# Altium PCB MachineLearning-MM-Carrier.PcbDoc
Units mil, origin at the board's own origin, x right, y up, seen from the top; angles counter-clockwise.
Board outline 2300 x 2050 mil, 2 copper layers (Top, Bottom); 138 components, 57 nets, 309 pads, 134 vias.
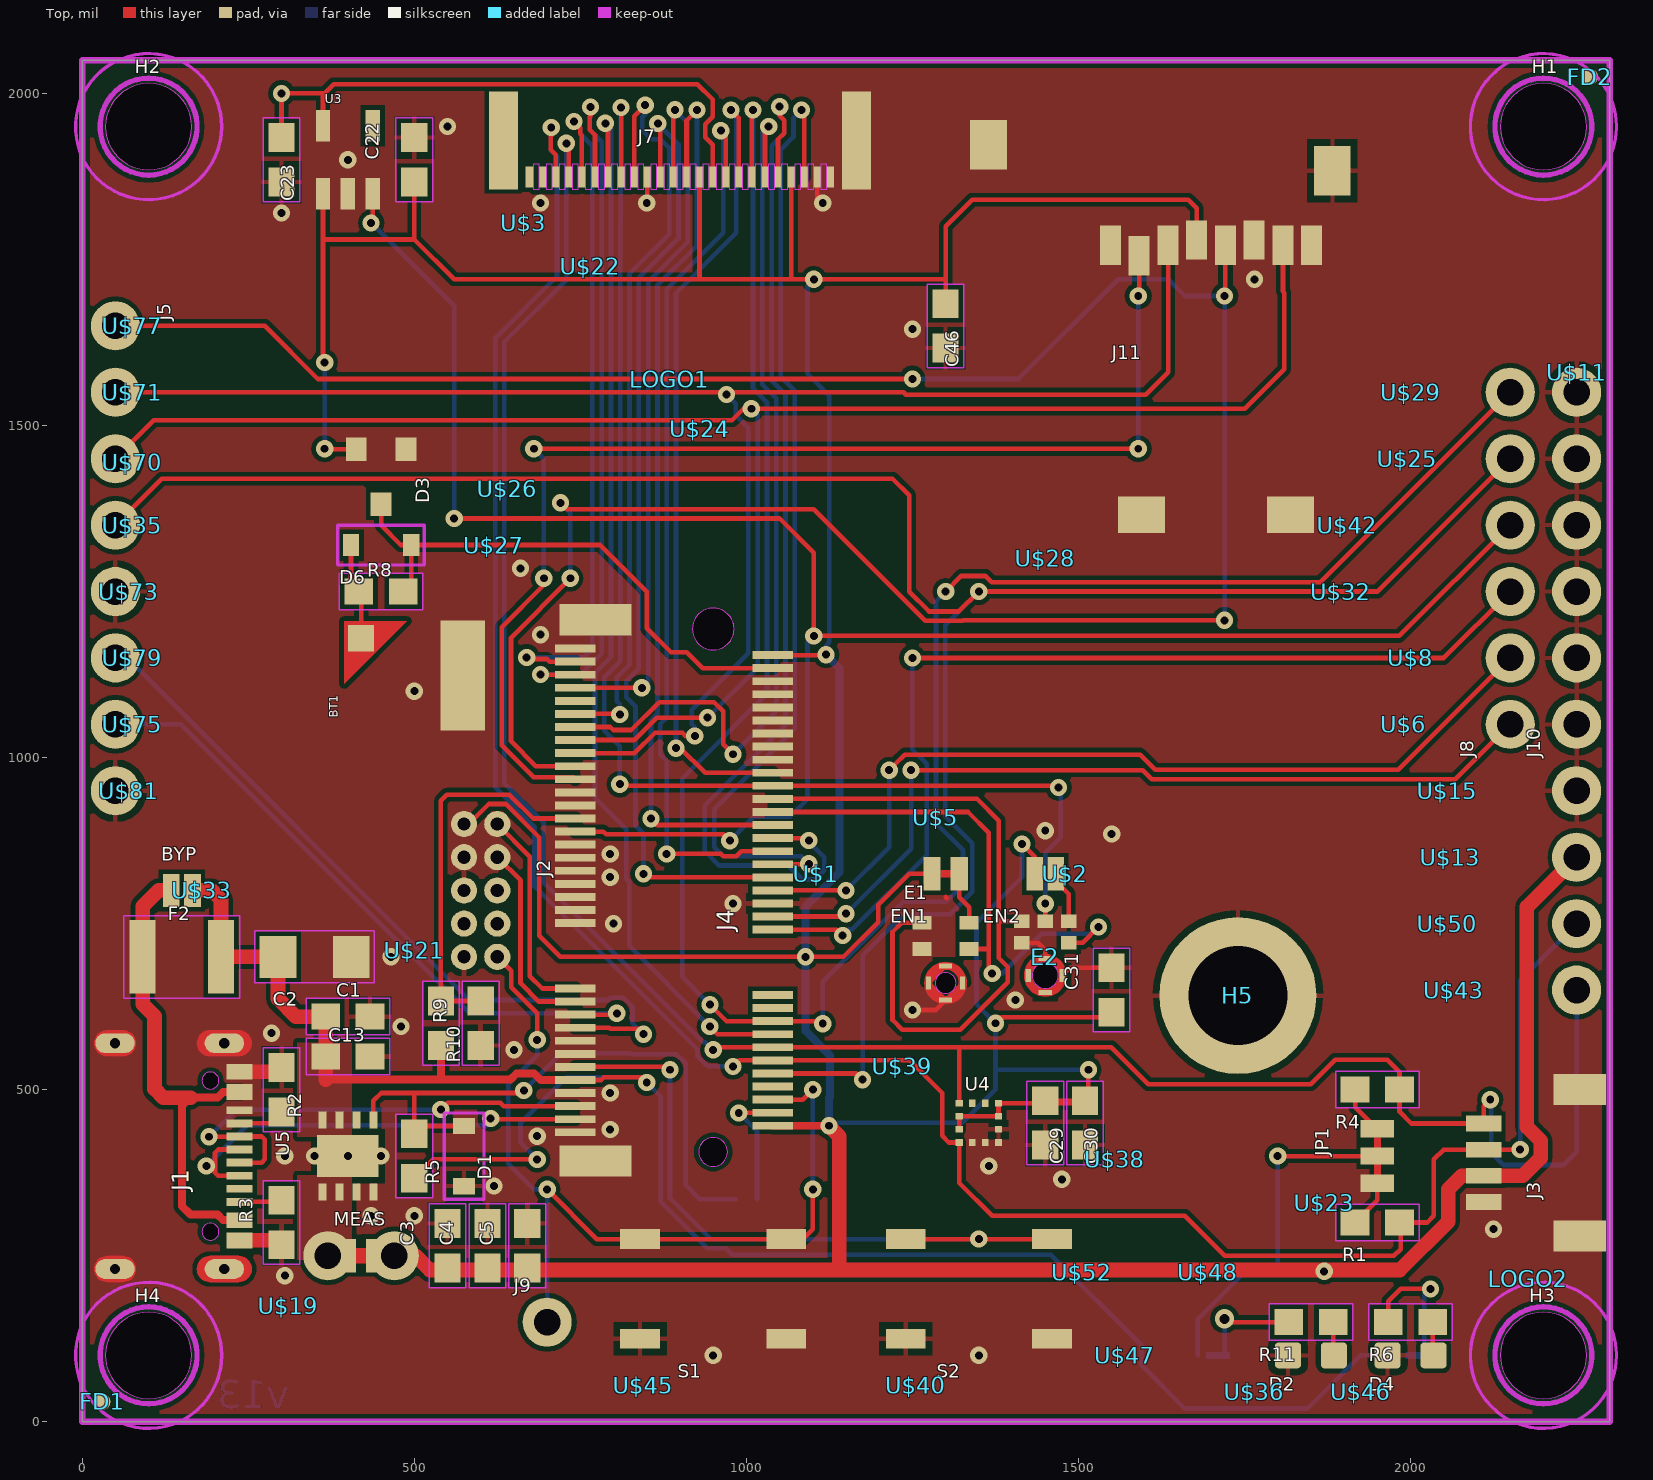
[diagram p0: Top view]
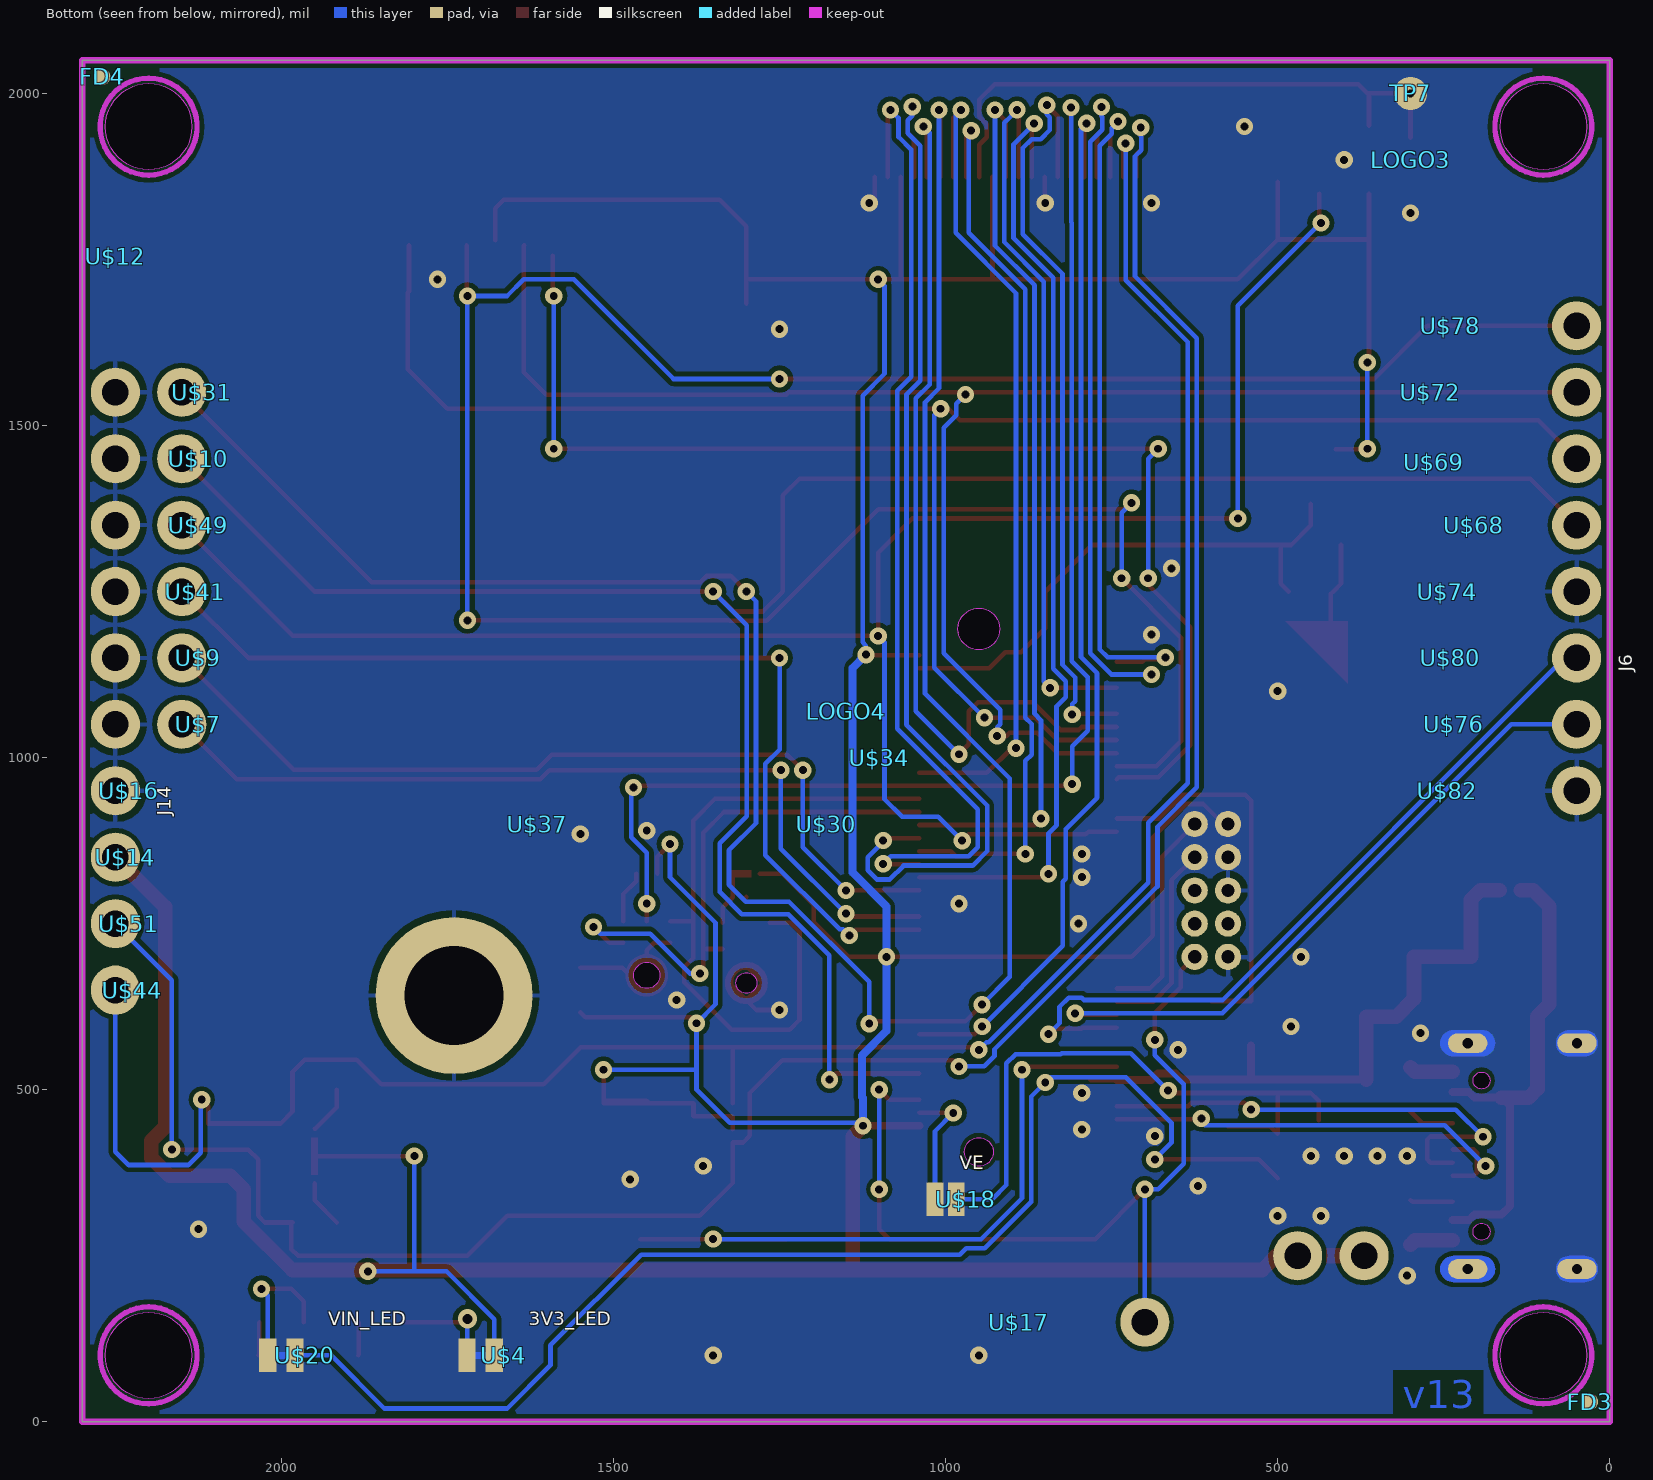
[diagram p1: Bottom view, seen from below]

## Layer stack, top to bottom
Top Solder: solder mask 0.4, Solder Resist, Dk 3.5
Top: signal copper 1.378
Dielectric 1: dielectric 12.6, FR-4, Dk 4.8
Bottom: signal copper 1.378
Bottom Solder: solder mask 0.4, Solder Resist, Dk 3.5

## Board outline
2300,0 0,0 0,2050 2300,2050
cut-out: 100,1885 ccw(c100,1950) 165,1950 ccw(c100,1950) 100,2015 ccw(c100,1950) 35,1950 ccw(c100,1950)
cut-out: 2200,35 ccw(c2200,100) 2265,100 ccw(c2200,100) 2200,165 ccw(c2200,100) 2135,100 ccw(c2200,100)
cut-out: 100,35 ccw(c100,100) 165,100 ccw(c100,100) 100,165 ccw(c100,100) 35,100 ccw(c100,100)
cut-out: 2200,1885 ccw(c2200,1950) 2265,1950 ccw(c2200,1950) 2200,2015 ccw(c2200,1950) 2135,1950 ccw(c2200,1950)
cut-out: 950,1162.2 ccw(c950,1193.7) 981.5,1193.7 ccw(c950,1193.7) 950,1225.19 ccw(c950,1193.7) 918.5,1193.7 ccw(c950,1193.7)
cut-out: 950,384.64 ccw(c950,406.3) 971.65,406.3 ccw(c950,406.3) 950,427.95 ccw(c950,406.3) 928.35,406.3 ccw(c950,406.3)
cut-out: 1450,652.37 ccw(c1450,672.05) 1469.68,672.05 ccw(c1450,672.05) 1450,691.74 ccw(c1450,672.05) 1430.32,672.05 ccw(c1450,672.05)
cut-out: 1300,644.88 ccw(c1300,660.63) 1315.75,660.63 ccw(c1300,660.63) 1300,676.38 ccw(c1300,660.63) 1284.25,660.63 ccw(c1300,660.63)
cut-out: 193.11,273.43 ccw(c193.11,286.22) 205.91,286.22 ccw(c193.11,286.22) 193.11,299.01 ccw(c193.11,286.22) 180.31,286.22 ccw(c193.11,286.22)
cut-out: 193.11,500.99 ccw(c193.11,513.78) 205.91,513.78 ccw(c193.11,513.78) 193.11,526.58 ccw(c193.11,513.78) 180.31,513.78 ccw(c193.11,513.78)

## Design rules (kind name [scope] priority, off if disabled: settings)
BoardOutlineClearance mdCopperDimension [All] p1: gap=10 ignorepadtopadclearanceinfootprint=FALSE except(0: Arc-SplitContinuation Track-SplitContinuation SMDPad-SplitContinuation THPad-SplitContinuation Via-SplitContinuation Fill-SplitContinuation Poly-SplitContinuation Region-SplitContinuation Text-SplitContinuation; 7: Poly-OutlineEdge Poly-CavityEdge Poly-CutoutEdge Poly-SplitBarrior)
Clearance Clearance_for_PolygonClass_Isolate_12 [InPolygonClass('Isolate_12') vs IsArc Or IsTrack Or IsPad Or IsVia Or IsFill Or IsRegion Or IsText] p1: gap=12 ignorepadtopadclearanceinfootprint=FALSE
Clearance Clearance_for_PolygonClass_Isolate_7 [InPolygonClass('Isolate_7') vs IsArc Or IsTrack Or IsPad Or IsVia Or IsFill Or IsRegion Or IsText] p2: gap=7 ignorepadtopadclearanceinfootprint=FALSE
Clearance "Clearance (Same Net)" [All] p3: gap=7 ignorepadtopadclearanceinfootprint=FALSE
Clearance [All] p4: gap=7 ignorepadtopadclearanceinfootprint=FALSE
HoleSize HoleSize_For_NetClass_power [InNetClass('power')] p1: absolutevalues=TRUE maxlimit=0 minlimit=0 maxpercent=80.000 minpercent=20.000
HoleSize [All] p2: absolutevalues=TRUE maxlimit=100000 minlimit=12 maxpercent=80.000 minpercent=20.000
HoleToHoleClearance mdDrill [All] p1: gap=7 allowstackedmicrovias=TRUE
MinimumSolderMaskSliver [All] p1 off: minsoldermaskwidth=10
PasteMaskExpansion Expansion_SMDPaste_OFF [InPadClass('SMDPaste_OFF')] p1: expansion=0
PasteMaskExpansion mlMinCreamFrame [All] p2: expansion=0
PolygonConnect PolygonConnect_For_PolygonThermal_ON_Width70000_Gap100000 [InPolygonClass('PolygonThermal_ON_Width70000_Gap100000') vs Not IsVia] p1: connectstyle=Relief reliefconductorwidth=7 reliefentries=4 polygonreliefangle="90 Angle" airgapwidth=10
PolygonConnect PolygonConnect_For_PolygonThermal_ON_Width120000_Gap100000 [InPolygonClass('PolygonThermal_ON_Width120000_Gap100000') vs Not IsVia] p2: connectstyle=Relief reliefconductorwidth=12 reliefentries=4 polygonreliefangle="90 Angle" airgapwidth=10
PolygonConnect ThermalVias [IsVia] p3: connectstyle=Direct reliefconductorwidth=10 reliefentries=4 polygonreliefangle="90 Angle" airgapwidth=10
PolygonConnect [All] p4: connectstyle=Relief reliefconductorwidth=10 reliefentries=4 polygonreliefangle="90 Angle" airgapwidth=10
RoutingVias [All] p1: holewidth=12 width=26 viastyle="Through Hole" minholewidth=12 minwidth=26 maxholewidth=100 maxwidth=100
SolderMaskExpansion Expansion_SMDSolder_OFF [InPadClass('SMDSolder_OFF')] p1: expansion=0 istentingtop=FALSE
SolderMaskExpansion mlMinStopFrame [All] p2: expansion=4 istentingtop=FALSE
Width Width_For_NetClass_power [InNetClass('power')] p1: maxlimit=60 minlimit=10 preferedwidth=30
Width [All] p2: maxlimit=10000 minlimit=7 preferedwidth=7
26 further rules are at their usual default settings.

## Classes and differential pairs
polygon class PolygonThermal_ON_Width70000_Gap100000: Polygon_1_Net_GND Polygon_2_Net_GND
polygon class PolygonThermal_ON_Width120000_Gap100000: Polygon_1_Net_VIN Polygon_1_Net_VREG_3.3V
polygon class Isolate_12: Polygon_1_Net_VREG_3.3V
polygon class Isolate_7: Polygon_1_Net_GND Polygon_1_Net_VIN Polygon_2_Net_GND
pad class SMDSolder_OFF: BT1-+ BT1-- E2-3 E2-7 E2-8 E2-9
pad class SMDPaste_OFF: 3V3_LED-1 3V3_LED-2 BT1-+ BT1-- BYP-1 BYP-2 E2-1 E2-2 E2-4 E2-5 E2-6 EN1-1 EN1-2 EN2-1 EN2-2 FD1-1 FD2-1 FD3-1 FD4-1 J4-1 J4-2 J4-3 J4-4 J4-5 J4-6 J4-7 J4-8 J4-9 J4-10 J4-11 J4-12 J4-13 J4-14 J4-15 J4-16 J4-17 J4-18 J4-19 J4-20 J4-21 J4-22 J4-23 J4-32 J4-33 J4-34 J4-35 J4-36 J4-37 J4-38 J4-39 J4-40 J4-41 J4-42 J4-43 J4-44 J4-45 J4-46 J4-47 J4-48 J4-49 J4-50 J4-51 J4-52 J4-53 J4-54 J4-55 J4-56 J4-57 J4-58 J4-59 J4-60 J4-61 J4-62 J4-63 J4-64 J4-65 J4-66 J4-67 J4-68 J4-69 J4-70 J4-71 J4-72 J4-73 J4-74 J4-75 JP1-1 JP1-2 JP1-3 MEAS-1 MEAS-2 TP7-P$1 U5-EP VE-1 VE-2 VIN_LED-1 VIN_LED-2

## Components (designator, comment, footprint, x,y, rotation, side; value= is the part's Value field where it differs from the comment)
3V3_LED "" SMT-JUMPER_2_NC_TRACE_SILK 1700,100 r180 bottom
BT1 "ML414H" ML414H_IV01E 500,1100 r90 top
BYP "JUMPER-SMT_2_NO_SILK" SMT-JUMPER_2_NO_SILK 150,800 r0 top
C1 "0.1uF" 0603 400,610 r0 top
C2 "10uF" EIA3216 350,700 r180 top
C3 "1.0uF" 0603 550,265 r90 top
C4 "0.1uF" 0603 610,265 r90 top
C5 "0.22uF" 0603 670,265 r90 top
C13 "0.22uF" 0603 400,550 r0 top
C22 "1.0uF" 0603 500,1900 r90 top
C23 "0.1uF" 0603 300,1900 r270 top
C29 "1.0uF" 0603 1450,450 r270 top
C30 "0.1uF" 0603 1510,450 r270 top
C31 "0.1uF" 0603 1550,650 r90 top
C46 "0.1uF" 0603 1300,1650 r270 top
D1 "3.3V" SOD-323 575,400 r270 top
D2 "RED" LED-0603 1850,100 r180 top
D3 "BAS70-05" SOT23-3 450,1425 r180 top
D4 "Yellow" LED-0603 2000,100 r180 top
D6 "3A/10V/280mV" SOD-323 450,1320 r180 top
E1 "SPH0641LM4H-1" SPH0641LM4H-1_MICROPHONE 1300,700 r0 top
E2 "" ICS-43434 1450,700 r270 top
EN1 "" SMT-JUMPER_2_NC_TRACE_SILK 1300,825 r180 top
EN2 "" SMT-JUMPER_2_NO_SILK 1450,825 r180 top
F2 "6V/2A" 1210 150,700 r0 top
FD1 "" FIDUCIAL-MICRO 30,30 r0 top
FD2 "" FIDUCIAL-MICRO 2270,2025 r0 top
FD3 "" FIDUCIAL-MICRO 30,30 r180 bottom
FD4 "" FIDUCIAL-MICRO 2270,2025 r180 bottom
FRAME1 "" CREATIVE_COMMONS 50,-400 r0 top
H1 "STAND-OFF" STAND-OFF 2200,1950 r0 top
H2 "STAND-OFF" STAND-OFF 100,1950 r0 top
H3 "STAND-OFF" STAND-OFF 2200,100 r0 top
H4 "STAND-OFF" STAND-OFF 100,100 r0 top
H5 "" STAND-OFF-REFLOW-M2.5 1740.16,641.73 r0 top
J1 "" USB-C-16P-2LAYER-PADS 250,400 r270 top
J2 "JTAG" 2X5-PTH-1.27MM 600,800 r270 top
J3 "QWIIC_RIGHT_ANGLE" JST04_1MM_RA 2110,390 r90 top
J4 "MICROMOD-2222-C" M.2-CONNECTOR-E 950,800 r270 top
J5 "SPI" 1X05_NO_SILK 50,1650 r270 top
J6 "UART" 1X03_NO_SILK 50,1150 r270 bottom
J7 "CAMERA-HIMAXFACEUP" FPC05024-42201 900,1890 r180 top
J8 "Dedicated" 1X06_NO_SILK 2150,1050 r90 top
J9 "" 1X01_NO_SILK 700,150 r0 top
J10 "" 1X06_NO_SILK 2250,1050 r90 top
J11 "microSD" MICRO-SD-SOCKET 1900,1350 r0 top
J14 "" 1X04_NO_SILK 2250,950 r270 bottom
JP1 "" SMT-JUMPER_3_2-NC_TRACE_SILK 1950,400 r90 top
LOGO1 "" SFE_LOGO_NAME_FLAME_.1 885,1570 r0 top
LOGO2 "" QWIIC_5.5MM 2177.5,215 r0 top
LOGO3 "" OSHW-LOGO-MINI 300,1900 r180 bottom
LOGO4 "" SFE_LOGO_NAME_FLAME_.1 1150,1070 r180 bottom
MEAS "" COMBO-JUMPER_2_NC_TRACE 420,250 r0 top
R1 "2.2k" 0603 1950,300 r180 top
R2 "5.1k" 0603 300,500 r270 top
R3 "5.1k" 0603 300,300 r90 top
R4 "2.2k" 0603 1950,500 r180 top
R5 "100k" 0603 500,400 r270 top
R6 "4.7k" 0603 2000,150 r180 top
R8 "3.3k" 0603 450,1250 r0 top
R9 "10k" 0603 600,600 r90 top
R10 "20k" 0603 540,600 r270 top
R11 "1k" 0603 1850,150 r180 top
S1 "Reset" TACTILE_SWITCH_SMD_5.2MM 950,200 r180 top
S2 "BOOT" TACTILE_SWITCH_SMD_5.2MM 1350,200 r180 top
TP7 "" PAD.03X.05 300,2000 r180 bottom
U3 "AP2127K-1.8V" SOT23-5 400,1900 r0 top
U4 "LIS2DH12" LGA-12-LISDH12 1350,450 r0 top
U5 "AP7361C-33FGE" UDFN-8 400,400 r0 top
U$1 "" #EN1#3 1105,825 r0 top
U$2 "" #EN2#4 1480,825 r0 top
U$3 "" CAMERA0 665,1805 r0 top
U$4 "" #3V3#0 1665,100 r180 bottom
U$5 "" MICS0 1285,910 r0 top
U$6 "" #A0#5 1990,1050 r0 top
U$7 "" #A0#5 2125,1050 r180 bottom
U$8 "" #A1#4 2000,1150 r0 top
U$9 "" #A1#4 2125,1150 r180 bottom
U$10 "" #D0#1 2125,1450 r180 bottom
U$11 "" #GND#0 2250,1580 r90 top
U$12 "" #GND#0 2250,1755 r270 bottom
U$13 "" #3V3#1 2060,850 r0 top
U$14 "" #3V3#1 2235,850 r180 bottom
U$15 "" #GND#0 2055,950 r0 top
U$16 "" #GND#0 2230,950 r180 bottom
U$17 "" #RST#1 890,150 r180 bottom
U$18 "" #VE#0 970,335 r180 bottom
U$19 "" #MEAS#2 310,175 r0 top
U$20 "" #VIN#1 1965,100 r180 bottom
U$21 "" SWD0 500,710 r90 top
U$22 "" FACE_UP0 765,1740 r0 top
U$23 "" #I�C#0 1870,330 r90 top
U$24 "" MICROMOD_LOGO_.35 930,1495 r0 top
U$25 "" #D0#1 1995,1450 r0 top
U$26 "" MACHINE0 640,1405 r0 top
U$27 "" LEARNING1 620,1320 r0 top
U$28 "" MICROSD0 1450,1300 r0 top
U$29 "" #D1#0 2000,1550 r0 top
U$30 "" LEARNING1 1180,900 r180 bottom
U$31 "" #D1#0 2120,1550 r180 bottom
U$32 "" #PWM0#3 1895,1250 r0 top
U$33 "" #BYP#1 180,800 r0 top
U$34 "" MICROMOD_LOGO_.35 1100,1000 r180 bottom
U$35 "" ##CS##3 75,1350 r0 top
U$36 "" 3V37 1765,45 r0 top
U$37 "" MACHINE0 1615,900 r180 bottom
U$38 "" 22223 1555,395 r0 top
U$39 "" ACCEL4 1235,535 r0 top
U$40 "" BOOT5 1255,55 r0 top
U$41 "" #PWM0#3 2130,1250 r180 bottom
U$42 "" #PWM1#2 1905,1350 r0 top
U$43 "" #SCL#3 2065,650 r0 top
U$44 "" #SCL#3 2225,650 r180 bottom
U$45 "" RESET6 845,55 r0 top
U$46 "" VIN8 1925,45 r0 top
U$47 "" X1 1570,100 r0 top
U$48 "" Y2 1695,225 r0 top
U$49 "" #PWM1#2 2125,1350 r180 bottom
U$50 "" #SDA#2 2055,750 r0 top
U$51 "" #SDA#2 2230,750 r180 bottom
U$52 "" Z0 1505,225 r0 top
U$68 "" ##CS##3 205,1350 r180 bottom
U$69 "" #CIPO#2 265,1445 r180 bottom
U$70 "" #CIPO#2 75,1445 r0 top
U$71 "" #COPI#1 75,1550 r0 top
U$72 "" #COPI#1 270,1550 r180 bottom
U$73 "" #GND#4 70,1250 r0 top
U$74 "" #GND#4 245,1250 r180 bottom
U$75 "" #RX1#6 75,1050 r0 top
U$76 "" #RX1#6 235,1050 r180 bottom
U$77 "" #SCK#0 75,1650 r0 top
U$78 "" #SCK#0 240,1650 r180 bottom
U$79 "" #TX1#5 75,1150 r0 top
U$80 "" #TX1#5 240,1150 r180 bottom
U$81 "" #GND#4 70,950 r0 top
U$82 "" #GND#4 245,950 r180 bottom
VE "" SMT-JUMPER_2_NO_SILK 1000,335 r180 bottom
VIN_LED "" SMT-JUMPER_2_NC_TRACE_SILK 2000,100 r180 bottom

## Footprints (in the part's own frame and the unit in brackets; to place one, negate y for a bottom-side part, rotate by r counter-clockwise, add the part's x,y. Pads: shape width x height; smd on the part's side, far side on the other; paste and mask are expansions set on the pad)
1X01_NO_SILK [mil] "1X01_NO_SILK"
  round 74 hole 40: 1(0,0)
  body extent -37,-37 37,37, height 150
1X03_NO_SILK [mil] "1X03_NO_SILK"
  round 74 hole 40: 1(0,0) 2(100,0) 3(200,0)
  body extent -37,-37 237,37, height 50
1X04_NO_SILK [mil] "1X04_NO_SILK"
  round 74 hole 40: 1(0,0) 2(100,0) 3(200,0) 4(300,0)
  body extent -37,-37 337,37, height 50
1X05_NO_SILK [mil] "1X05_NO_SILK"
  round 74 hole 40: 1(0,0) 2(100,0) 3(200,0) 4(300,0) 5(400,0)
  body extent -37,-37 437,37, height 150
1X06_NO_SILK [mil] "1X06_NO_SILK"
  round 74 hole 40: 1(0,0) 2(100,0) 3(200,0) 4(300,0) 5(400,0) 6(500,0)
  body extent -37,-37 537,37, height 150
2X5-PTH-1.27MM [mm] "2X5-PTH-1.27MM"
  round 1 hole 0.508: 1(-2.54,-0.635) 2(-2.54,0.635) 3(-1.27,-0.635) 4(-1.27,0.635) 5(0,-0.635) 6(0,0.635) 7(1.27,-0.635) 8(1.27,0.635) 9(2.54,-0.635) 10(2.54,0.635)
  body extent -3.05,-1.14 3.05,1.14, height 1.27
3V37 [mil] "3V37"
0603 [mm] "0603"
  rect 1.1x1 smd: 1(-0.85,0) 2(0.85,0)
  Top keep-out lines w0.051: -1.6,-0.7 -1.6,0.7 1.6,0.7 1.6,-0.7 -1.6,-0.7
  body extent -1.63,-0.73 1.63,0.73, height 3.81
1210 [mm] "1210"
  rect 1x2.8 smd: 1(-1.5,0) 2(1.5,0)
  Top keep-out lines w0.051: -2.215,-1.575 -2.215,1.575 2.215,1.575 2.215,-1.575 -2.215,-1.575
  body extent -2.24,-1.6 2.24,1.6, height 3.81
22223 [mil] "22223"
#3V3#0 [mil] "#3V3#0"
#3V3#1 [mil] "#3V3#1"
##CS##3 [mil] "##CS##3"
#A0#5 [mil] "#A0#5"
#A1#4 [mil] "#A1#4"
#BYP#1 [mil] "#BYP#1"
#CIPO#2 [mil] "#CIPO#2"
#COPI#1 [mil] "#COPI#1"
#D0#1 [mil] "#D0#1"
#D1#0 [mil] "#D1#0"
#EN1#3 [mil] "#EN1#3"
#EN2#4 [mil] "#EN2#4"
#GND#0 [mil] "#GND#0"
#GND#4 [mil] "#GND#4"
#I�C#0 [mil] "#I�C#0"
#MEAS#2 [mil] "#MEAS#2"
#PWM0#3 [mil] "#PWM0#3"
#PWM1#2 [mil] "#PWM1#2"
#RST#1 [mil] "#RST#1"
#RX1#6 [mil] "#RX1#6"
#SCK#0 [mil] "#SCK#0"
#SCL#3 [mil] "#SCL#3"
#SDA#2 [mil] "#SDA#2"
#TX1#5 [mil] "#TX1#5"
#VE#0 [mil] "#VE#0"
#VIN#1 [mil] "#VIN#1"
ACCEL4 [mil] "ACCEL4"
BOOT5 [mil] "BOOT5"
CAMERA0 [mil] "CAMERA0"
COMBO-JUMPER_2_NC_TRACE [mil] "COMBO-JUMPER_2_NC_TRACE"
  rect 25x50 smd paste+0: 1(-20,0) 2(20,0)
  round 74 hole 40: 3(-50,0) 4(50,0)
  Top region: -27.5,11 7.25,11 7.25,-11 -27.5,-11 -27.5,11
  body extent -87,-37 87,37, height 150
CREATIVE_COMMONS [mil] "CREATIVE_COMMONS"
EIA3216 [mil] "EIA3216"
  rect 55.12x62.99 smd: +(55.12,0) -(-55.12,0)
  Top keep-out lines w2: 90,39 90,-39 -90,-39 -90,39 90,39
  body extent -103,-52 103,52, height 150
FACE_UP0 [mil] "FACE_UP0"
FIDUCIAL-MICRO [mil] "FIDUCIAL-MICRO"
  rrect100% 25x25 smd paste+0: 1(0,0)
  body extent -13,-13 13,13, height 50
FPC05024-42201 [mil] "FPC05024-42201"
  rect 11.81x31.5 smd: 1(226.38,15.75) 2(206.69,15.75) 3(187.01,15.75) 4(167.32,15.75) 5(147.64,15.75) 6(127.95,15.75) 7(108.27,15.75) 8(88.58,15.75) 9(68.9,15.75) 10(49.21,15.75) 11(29.53,15.75) 12(9.84,15.75) 13(-9.84,15.75) 14(-29.53,15.75) 15(-49.21,15.75) 16(-68.9,15.75) 17(-88.58,15.75) 18(-108.27,15.75) 19(-127.95,15.75) 20(-147.64,15.75) 21(-167.32,15.75) 22(-187.01,15.75) 23(-206.69,15.75) 24(-226.38,15.75)
  rect 43.31x147.64 smd: MNT1(-265.75,-39.37) MNT2(265.75,-39.37)
  Top keep-out region: 212.6,-3.94 212.6,35.43 220.47,35.43 220.47,-3.94
  Top keep-out region: 192.91,-3.94 192.91,35.43 200.79,35.43 200.79,-3.94
  Top keep-out region: 173.23,-3.94 173.23,35.43 181.1,35.43 181.1,-3.94
  Top keep-out region: 153.54,-3.94 153.54,35.43 161.42,35.43 161.42,-3.94
  Top keep-out region: 133.86,-3.94 133.86,35.43 141.73,35.43 141.73,-3.94
  Top keep-out region: 114.17,-3.94 114.17,35.43 122.05,35.43 122.05,-3.94
  Top keep-out region: 94.49,-3.94 94.49,35.43 102.36,35.43 102.36,-3.94
  Top keep-out region: 74.8,-3.94 74.8,35.43 82.68,35.43 82.68,-3.94
  Top keep-out region: 55.12,-3.94 55.12,35.43 62.99,35.43 62.99,-3.94
  Top keep-out region: 35.43,-3.94 35.43,35.43 43.31,35.43 43.31,-3.94
  Top keep-out region: 15.75,-3.94 15.75,35.43 23.62,35.43 23.62,-3.94
  Top keep-out region: -3.94,-3.94 -3.94,35.43 3.94,35.43 3.94,-3.94
  Top keep-out region: -23.62,-3.94 -23.62,35.43 -15.75,35.43 -15.75,-3.94
  Top keep-out region: -43.31,-3.94 -43.31,35.43 -35.43,35.43 -35.43,-3.94
  Top keep-out region: -62.99,-3.94 -62.99,35.43 -55.12,35.43 -55.12,-3.94
  Top keep-out region: -82.68,-3.94 -82.68,35.43 -74.8,35.43 -74.8,-3.94
  Top keep-out region: -102.36,-3.94 -102.36,35.43 -94.49,35.43 -94.49,-3.94
  Top keep-out region: -122.05,-3.94 -122.05,35.43 -114.17,35.43 -114.17,-3.94
  Top keep-out region: -141.73,-3.94 -141.73,35.43 -133.86,35.43 -133.86,-3.94
  Top keep-out region: -161.42,-3.94 -161.42,35.43 -153.54,35.43 -153.54,-3.94
  Top keep-out region: -181.1,-3.94 -181.1,35.43 -173.23,35.43 -173.23,-3.94
  Top keep-out region: -200.79,-3.94 -200.79,35.43 -192.91,35.43 -192.91,-3.94
  Top keep-out region: -220.47,-3.94 -220.47,35.43 -212.6,35.43 -212.6,-3.94
  body extent -287,-113 287,35, height 150
ICS-43434 [mm] "ICS-43434"
  rect 0.522x0.6 smd paste+0: 1(-1.364,-0.9) 2(-0.542,-0.9) 4(-0.542,0.9) 5(-1.364,0.9) 6(-1.364,0)
  rect 0.2x0.5 smd mask+0: 3(1.36,0) 8(0.06,0)
  rect 0.5x0.2 smd mask+0: 7(0.71,0.65) 9(0.71,-0.65)
  Top region: 0.19,0 0.23,0.199 0.342,0.368 0.511,0.48 0.71,0.52 0.71,0.52 0.71,0.81 0.4,0.748 0.137,0.573 -0.038,0.31 -0.1,0 -0.1,0 0.19,0
  Top region: 0.71,0.52 0.909,0.48 1.078,0.368 1.19,0.199 1.23,0 1.23,0 1.52,0 1.458,0.31 1.283,0.573 1.02,0.748 0.71,0.81 0.71,0.81 0.71,0.52
  Top region: 1.23,0 1.19,-0.199 1.078,-0.368 0.909,-0.48 0.71,-0.52 0.71,-0.52 0.71,-0.81 1.02,-0.748 1.283,-0.573 1.458,-0.31 1.52,0 1.52,0 1.23,0
  Top region: 0.71,-0.52 0.511,-0.48 0.342,-0.368 0.23,-0.199 0.19,0 0.19,0 -0.1,0 -0.038,-0.31 0.137,-0.573 0.4,-0.748 0.71,-0.81 0.71,-0.81 0.71,-0.52
  body extent -1.78,-1.35 1.78,1.35, height 3.81
JST04_1MM_RA [mm] "JST04_1MM_RA"
  rect 0.6x1.35 smd: 1(-1.5,0) 2(-0.5,0) 3(0.5,0) 4(1.5,0)
  rect 1.2x2 smd: NC1(2.8,-3.675) NC2(-2.8,-3.675)
  body extent -3.4,-4.68 3.4,0.68, height 1.27
LEARNING1 [mil] "LEARNING1"
LED-0603 [mm] "LED-0603"
  rrect30% 1x1 smd: A(-0.877,0) C(0.877,0)
  body extent -1.39,-0.54 1.39,0.54, height 3.81
LGA-12-LISDH12 [mil] "LGA-12-LISDH12"
  rect 10.83x9.84 smd: 1(-29.53,29.53) 2(-29.53,9.84) 3(-29.53,-9.84) 4(-29.53,-29.53) 7(29.53,-29.53) 8(29.53,-9.84) 9(29.53,9.84) 10(29.53,29.53)
  rect 9.84x10.83 smd: 5(-9.84,-29.53) 6(9.84,-29.53) 11(9.84,29.53) 12(-9.84,29.53)
  body extent -39,-39 39,39, height 150
M.2-CONNECTOR-E [mm] "M.2-CONNECTOR-E"
  rect 0.3x1.55 smd paste+0: 1(9.25,-5.275) 2(9,2.275) 3(8.75,-5.275) 4(8.5,2.275) 5(8.25,-5.275) 6(8,2.275) 7(7.75,-5.275) 8(7.5,2.275) 9(7.25,-5.275) 10(7,2.275) 11(6.75,-5.275) 12(6.5,2.275) 13(6.25,-5.275) 14(6,2.275) 15(5.75,-5.275) 16(5.5,2.275) 17(5.25,-5.275) 18(5,2.275) 19(4.75,-5.275) 20(4.5,2.275) 21(4.25,-5.275) 22(4,2.275) 23(3.75,-5.275) 32(1.5,2.275) 33(1.25,-5.275) 34(1,2.275) 35(0.75,-5.275) 36(0.5,2.275) 37(0.25,-5.275) 38(0,2.275) 39(-0.25,-5.275) 40(-0.5,2.275) 41(-0.75,-5.275) 42(-1,2.275) 43(-1.25,-5.275) 44(-1.5,2.275) 45(-1.75,-5.275) 46(-2,2.275) 47(-2.25,-5.275) 48(-2.5,2.275) 49(-2.75,-5.275) 50(-3,2.275) 51(-3.25,-5.275) 52(-3.5,2.275) 53(-3.75,-5.275) 54(-4,2.275) 55(-4.25,-5.275) 56(-4.5,2.275) 57(-4.75,-5.275) 58(-5,2.275) 59(-5.25,-5.275) 60(-5.5,2.275) 61(-5.75,-5.275) 62(-6,2.275) 63(-6.25,-5.275) 64(-6.5,2.275) 65(-6.75,-5.275) 66(-7,2.275) 67(-7.25,-5.275) 68(-7.5,2.275) 69(-7.75,-5.275) 70(-8,2.275) 71(-8.25,-5.275) 72(-8.5,2.275) 73(-8.75,-5.275) 74(-9,2.275) 75(-9.25,-5.275)
  rect 1.2x2.75 smd: A1(10.35,-4.5) A2(-10.35,-4.5)
  body extent -11.03,-6.15 11.03,23.03, height 3.81
MACHINE0 [mil] "MACHINE0"
MICRO-SD-SOCKET [mil] "MICRO-SD-SOCKET"
  rect 70.87x55.12 smd: CD1(-80.71,15.75) CD2(-305.12,15.75)
  rect 31.5x59.06 smd: CS/DAT3(-308.66,405.51) DAT1(-48.82,421.26) DAT2(-351.97,421.26) DI/CMD(-265.35,421.26) DO/DAT0(-92.13,421.26) GND(-135.43,429.13) SCLK(-178.74,421.26) VCC(-222.05,429.13)
  rect 55.12x74.8 smd: GND1(-535.43,572.83) GND3(-17.72,533.46)
  body extent -563,-12 10,819, height 150
MICROMOD_LOGO_.35 [mil] "MICROMOD_LOGO_.35"
MICROSD0 [mil] "MICROSD0"
MICS0 [mil] "MICS0"
ML414H_IV01E [mm] "ML414H_IV01E"
  rect 1x1 smd paste+0 mask+0: +(2.022,2.032)
  rect 4.2x1.7 smd paste+0 mask+0: -(0.6,-1.85)
  Top region: 0.28,2.68 2.68,2.68 2.68,0.28 0.28,2.68
  body extent -2.44,-2.7 2.7,2.68, height 3.81
OSHW-LOGO-MINI [mil] "OSHW-LOGO-MINI"
PAD.03X.05 [mil] "PAD.03X.05"
  rrect100% 50x50 smd paste+0: P$1(0,0)
  body extent -25,-25 25,25, height 50
QWIIC_5.5MM [mil] "QWIIC_5.5MM"
RESET6 [mil] "RESET6"
SFE_LOGO_NAME_FLAME_.1 [mil] "SFE_LOGO_NAME_FLAME_.1"
SMT-JUMPER_2_NC_TRACE_SILK [mil] "SMT-JUMPER_2_NC_TRACE_SILK"
  rect 26x50 smd paste+0: 1(-20.5,0) 2(20.5,0)
  Top region: -27.5,5 7.25,5 7.25,-5 -27.5,-5 -27.5,5
  body extent -34,-25 34,25, height 150
SMT-JUMPER_2_NO_SILK [mil] "SMT-JUMPER_2_NO_SILK"
  rect 25x50 smd paste+0: 1(-16,0) 2(16,0)
  body extent -28,-25 28,25, height 50
SMT-JUMPER_3_2-NC_TRACE_SILK [mil] "SMT-JUMPER_3_2-NC_TRACE_SILK"
  rect 26x50 smd paste+0: 1(-41,0) 2(0,0) 3(41,0)
  Top region: -27.75,5 27.75,5 27.75,-5 -27.75,-5 -27.75,5
  body extent -54,-25 54,25, height 150
SOD-323 [mil] "SOD-323"
  rect 24.8x32.68 smd: A(45.28,0) C(-45.28,0)
  Top keep-out lines w5: 65,-30 -65,-30 -65,30 65,30 65,-30
  body extent -68,-33 68,33, height 150
SOT23-3 [mil] "SOT23-3"
  rect 31.5x35.43 smd: 1(-37.4,-39.37) 2(37.4,-39.37) 3(0,43.31)
  body extent -59,-57 59,61, height 150
SOT23-5 [mil] "SOT23-5"
  rect 21.65x47.24 smd: 1(-37.4,-51.19) 2(0,-51.19) 3(37.4,-51.19) 4(37.4,51.19) 5(-37.4,51.19)
  body extent -58,-75 58,75, height 150
SPH0641LM4H-1_MICROPHONE [mm] "SPH0641LM4H-1_MICROPHONE"
  rect 0.725x0.522 smd: 1(-0.9,1.3) 2(-0.9,0.3) 4(0.9,0.3) 5(0.9,1.3)
  rect 0.5x0.2 smd: 3(0,-1.65) 8(0,-0.35)
  rect 0.2x0.5 smd: 6(-0.65,-1) 7(0.65,-1)
  Top region: 0,-0.49 0.255,-0.558 0.442,-0.745 0.51,-1 0.51,-1 0.81,-1 0.748,-0.69 0.573,-0.427 0.31,-0.252 0,-0.19 0,-0.19 0,-0.49
  Top region: 0.51,-1 0.471,-1.195 0.361,-1.361 0.195,-1.471 0,-1.51 0,-1.51 0,-1.81 0.31,-1.748 0.573,-1.573 0.748,-1.31 0.81,-1 0.81,-1 0.51,-1
  Top region: 0,-1.51 -0.195,-1.471 -0.361,-1.361 -0.471,-1.195 -0.51,-1 -0.51,-1 -0.81,-1 -0.748,-1.31 -0.573,-1.573 -0.31,-1.748 0,-1.81 0,-1.81 0,-1.51
  Top region: -0.51,-1 -0.442,-0.745 -0.255,-0.558 0,-0.49 0,-0.49 0,-0.19 -0.31,-0.252 -0.573,-0.427 -0.748,-0.69 -0.81,-1 -0.81,-1 -0.51,-1
  body extent -1.26,-1.97 1.26,1.56, height 3.81
STAND-OFF [mil] "STAND-OFF"
  Top keep-out circle w5: c0,0 r110
  Top keep-out lines w8: 0,-73 cw(c0,0) 0,73 cw(c0,0) 0,-73
  Bottom keep-out lines w8: 0,-73 cw(c0,0) 0,73 cw(c0,0) 0,-73
  body extent -113,-113 113,113, height 150
STAND-OFF-REFLOW-M2.5 [mm] "STAND-OFF-REFLOW-M2.5"
  round 6 hole 3.8: 1(0,0)
  body extent -3.01,-3.01 3.01,3.01, height 3.81
SWD0 [mil] "SWD0"
TACTILE_SWITCH_SMD_5.2MM [mil] "TACTILE_SWITCH_SMD_5.2MM"
  rect 60x30 smd: 1(-110,75) 2(110,75) 3(-110,-75) 4(110,-75)
  body extent -140,-104 140,104, height 150
UDFN-8 [mm] "UDFN-8"
  rect 0.3x0.65 smd: 1(-0.975,-1.375) 2(-0.325,-1.375) 3(0.325,-1.375) 4(0.975,-1.375) 5(0.975,1.375) 6(0.325,1.375) 7(-0.325,1.375) 8(-0.975,1.375)
  rect 2.35x1.6 smd paste+0: EP(0,0)
  body extent -1.51,-1.7 1.51,1.7, height 3.81
USB-C-16P-2LAYER-PADS [mm] "USB-C-16P-2LAYER-PADS"
  rect 0.3x1 smd: A5(-1.25,-0.34) A6(-0.25,-0.34) A7(0.25,-0.34) A8(1.25,-0.34) B5(1.75,-0.34) B6(0.75,-0.34) B7(-0.75,-0.34) B8(-1.75,-0.34)
  rect 0.6x1 smd: GND(-3.225,-0.34) GND2(3.225,-0.34) VBUS1(-2.45,-0.34) VBUS2(2.45,-0.34)
  oval 0.756x1.511 hole 0.4: SHLD1(-4.318,-0.915) SHLD2(4.318,-0.915) SHLD3(-4.318,-5.095) SHLD4(4.318,-5.095)
  Top region: 4.818,-4.795 4.818,-5.395 4.78,-5.586 4.672,-5.749 4.509,-5.857 4.318,-5.895 4.318,-5.895 4.127,-5.857 3.964,-5.749 3.856,-5.586 3.818,-5.395 3.818,-5.395 3.818,-4.795 3.856,-4.604 3.964,-4.441 4.127,-4.333 4.318,-4.295 4.318,-4.295 4.509,-4.333 4.672,-4.441 4.78,-4.604 4.818,-4.795 4.818,-4.795
  Top region: -4.318,-5.895 -4.509,-5.857 -4.672,-5.749 -4.78,-5.586 -4.818,-5.395 -4.818,-5.395 -4.818,-4.795 -4.78,-4.604 -4.672,-4.441 -4.509,-4.333 -4.318,-4.295 -4.318,-4.295 -4.127,-4.333 -3.964,-4.441 -3.856,-4.604 -3.818,-4.795 -3.818,-4.795 -3.818,-5.395 -3.856,-5.586 -3.964,-5.749 -4.127,-5.857 -4.318,-5.895 -4.318,-5.895
  Top region: 4.818,-0.365 4.818,-1.465 4.78,-1.656 4.672,-1.819 4.509,-1.927 4.318,-1.965 4.318,-1.965 4.127,-1.927 3.965,-1.819 3.856,-1.656 3.818,-1.465 3.818,-1.465 3.818,-0.365 3.856,-0.174 3.964,-0.011 4.127,0.097 4.318,0.135 4.318,0.135 4.509,0.097 4.672,-0.011 4.78,-0.174 4.818,-0.365 4.818,-0.365
  Top region: -3.818,-0.365 -3.818,-1.465 -3.856,-1.656 -3.965,-1.819 -4.127,-1.927 -4.318,-1.965 -4.318,-1.965 -4.568,-1.898 -4.751,-1.715 -4.818,-1.465 -4.818,-1.465 -4.818,-0.365 -4.78,-0.174 -4.672,-0.011 -4.509,0.097 -4.318,0.135 -4.318,0.135 -4.127,0.097 -3.964,-0.011 -3.856,-0.174 -3.818,-0.365 -3.818,-0.365
  Bottom region: 4.318,-5.895 4.509,-5.857 4.672,-5.749 4.78,-5.586 4.818,-5.395 4.818,-5.395 4.818,-4.795 4.78,-4.604 4.672,-4.441 4.509,-4.333 4.318,-4.295 4.318,-4.295 4.127,-4.333 3.964,-4.441 3.856,-4.604 3.818,-4.795 3.818,-4.795 3.818,-5.395 3.856,-5.586 3.964,-5.749 4.127,-5.857 4.318,-5.895 4.318,-5.895
  Bottom region: -4.818,-4.795 -4.818,-5.395 -4.78,-5.586 -4.672,-5.749 -4.509,-5.857 -4.318,-5.895 -4.318,-5.895 -4.127,-5.857 -3.964,-5.749 -3.856,-5.586 -3.818,-5.395 -3.818,-5.395 -3.818,-4.795 -3.856,-4.604 -3.964,-4.441 -4.127,-4.333 -4.318,-4.295 -4.318,-4.295 -4.509,-4.333 -4.672,-4.441 -4.78,-4.604 -4.818,-4.795 -4.818,-4.795
  Bottom region: 3.818,-0.365 3.818,-1.465 3.856,-1.656 3.965,-1.819 4.127,-1.927 4.318,-1.965 4.318,-1.965 4.509,-1.927 4.672,-1.819 4.78,-1.656 4.818,-1.465 4.818,-1.465 4.818,-0.365 4.78,-0.174 4.672,-0.011 4.509,0.097 4.318,0.135 4.318,0.135 4.127,0.097 3.964,-0.011 3.856,-0.174 3.818,-0.365 3.818,-0.365
  Bottom region: -4.818,-0.365 -4.818,-1.465 -4.751,-1.715 -4.568,-1.898 -4.318,-1.965 -4.318,-1.965 -4.127,-1.927 -3.965,-1.819 -3.856,-1.656 -3.818,-1.465 -3.818,-1.465 -3.818,-0.365 -3.856,-0.174 -3.964,-0.011 -4.127,0.097 -4.318,0.135 -4.318,0.135 -4.509,0.097 -4.672,-0.011 -4.78,-0.174 -4.818,-0.365 -4.818,-0.365
  body extent -4.92,-7.78 4.92,0.24, height 3.81
VIN8 [mil] "VIN8"
X1 [mil] "X1"
Y2 [mil] "Y2"
Z0 [mil] "Z0"

## Part data
3V3_LED EN1 VIN_LED: library part SMT-JUMPER_2_NC_TRACE_SILK, PackageName=SMT-JUMPER_2_NC_TRACE_SILK
BT1: library part ML414H_IV01E, PackageName=ML414H_IV01E
BYP EN2 VE: library part SMT-JUMPER_2_NO_SILK, PackageName=SMT-JUMPER_2_NO_SILK
C1 C3 C4 C5 C13 C22 C23 C29 C30 C31 C46 R1 R2 R3 R4 R5 R6 R8 R9 R10 R11: library part 0603, PackageName=0603
C2: library part EIA3216, PackageName=EIA3216
D1 D6: library part SOD-323, PackageName=SOD-323
D2 D4: library part LED-0603, PackageName=LED-0603
D3: library part SOT23-3, PackageName=SOT23-3
E1: library part SPH0641LM4H-1_MICROPHONE, PackageName=SPH0641LM4H-1_MICROPHONE
E2: library part ICS-43434, PackageName=ICS-43434
F2: library part 1210, PackageName=1210
FD1 FD2 FD3 FD4: library part FIDUCIAL-MICRO, PackageName=FIDUCIAL-MICRO
FRAME1: library part CREATIVE_COMMONS, PackageName=CREATIVE_COMMONS
H5: library part STAND-OFF-REFLOW-M2.5, PackageName=STAND-OFF-REFLOW-M2.5
J1: library part USB-C-16P-2LAYER-PADS, PackageName=USB-C-16P-2LAYER-PADS
J2: library part 2X5-PTH-1.27MM, PackageName=2X5-PTH-1.27MM
J3: library part JST04_1MM_RA, PackageName=JST04_1MM_RA
J4: library part M.2-CONNECTOR-E, PackageName=M.2-CONNECTOR-E
J5: library part 1X05_NO_SILK, PackageName=1X05_NO_SILK
J6: library part 1X03_NO_SILK, PackageName=1X03_NO_SILK
J7: library part FPC05024-42201, PackageName=FPC05024-42201
J8 J10: library part 1X06_NO_SILK, PackageName=1X06_NO_SILK
J9: library part 1X01_NO_SILK, PackageName=1X01_NO_SILK
J11: library part MICRO-SD-SOCKET, PackageName=MICRO-SD-SOCKET
J14: library part 1X04_NO_SILK, PackageName=1X04_NO_SILK
JP1: library part SMT-JUMPER_3_2-NC_TRACE_SILK, PackageName=SMT-JUMPER_3_2-NC_TRACE_SILK
LOGO1 LOGO4: library part SFE_LOGO_NAME_FLAME_.1, PackageName=SFE_LOGO_NAME_FLAME_.1
LOGO2: library part QWIIC_5.5MM, PackageName=QWIIC_5.5MM
LOGO3: library part OSHW-LOGO-MINI, PackageName=OSHW-LOGO-MINI
MEAS: library part COMBO-JUMPER_2_NC_TRACE, PackageName=COMBO-JUMPER_2_NC_TRACE
S1 S2: library part TACTILE_SWITCH_SMD_5.2MM, PackageName=TACTILE_SWITCH_SMD_5.2MM
TP7: library part PAD.03X.05, PackageName=PAD.03X.05
U3: library part SOT23-5, PackageName=SOT23-5
U4: library part LGA-12-LISDH12, PackageName=LGA-12-LISDH12
U5: library part UDFN-8, PackageName=UDFN-8
U$1: library part #EN1#3, PackageName=#EN1#3
U$2: library part #EN2#4, PackageName=#EN2#4
U$3: library part CAMERA0, PackageName=CAMERA0
U$4: library part #3V3#0, PackageName=#3V3#0
U$5: library part MICS0, PackageName=MICS0
U$6 U$7: library part #A0#5, PackageName=#A0#5
U$8 U$9: library part #A1#4, PackageName=#A1#4
U$10 U$25: library part #D0#1, PackageName=#D0#1
U$11 U$12 U$15 U$16: library part #GND#0, PackageName=#GND#0
U$13 U$14: library part #3V3#1, PackageName=#3V3#1
U$17: library part #RST#1, PackageName=#RST#1
U$18: library part #VE#0, PackageName=#VE#0
U$19: library part #MEAS#2, PackageName=#MEAS#2
U$20: library part #VIN#1, PackageName=#VIN#1
U$21: library part SWD0, PackageName=SWD0
U$22: library part FACE_UP0, PackageName=FACE_UP0
U$23: library part #I�C#0, PackageName=#I�C#0
U$24 U$34: library part MICROMOD_LOGO_.35, PackageName=MICROMOD_LOGO_.35
U$26 U$37: library part MACHINE0, PackageName=MACHINE0
U$27 U$30: library part LEARNING1, PackageName=LEARNING1
U$28: library part MICROSD0, PackageName=MICROSD0
U$29 U$31: library part #D1#0, PackageName=#D1#0
U$32 U$41: library part #PWM0#3, PackageName=#PWM0#3
U$33: library part #BYP#1, PackageName=#BYP#1
U$35 U$68: library part ##CS##3, PackageName=##CS##3
U$36: library part 3V37, PackageName=3V37
U$38: library part 22223, PackageName=22223
U$39: library part ACCEL4, PackageName=ACCEL4
U$40: library part BOOT5, PackageName=BOOT5
U$42 U$49: library part #PWM1#2, PackageName=#PWM1#2
U$43 U$44: library part #SCL#3, PackageName=#SCL#3
U$45: library part RESET6, PackageName=RESET6
U$46: library part VIN8, PackageName=VIN8
U$47: library part X1, PackageName=X1
U$48: library part Y2, PackageName=Y2
U$50 U$51: library part #SDA#2, PackageName=#SDA#2
U$52: library part Z0, PackageName=Z0
U$69 U$70: library part #CIPO#2, PackageName=#CIPO#2
U$71 U$72: library part #COPI#1, PackageName=#COPI#1
U$73 U$74 U$81 U$82: library part #GND#4, PackageName=#GND#4
U$75 U$76: library part #RX1#6, PackageName=#RX1#6
U$77 U$78: library part #SCK#0, PackageName=#SCK#0
U$79 U$80: library part #TX1#5, PackageName=#TX1#5
H1 H2 H3 H4: PackageName=STAND-OFF

## Free pads (board coordinates)
  round 130 hole 130 unplated: MH1(100,100) MH1(100,1950) MH1(2200,100) MH1(2200,1950)
  round 25.59 hole 25.59 unplated: MH1(193.11,513.78) MH2(193.11,286.22)
  round 43.31 hole 43.31 unplated: MH1(950,406.3)
  round 31.5 hole 31.5 unplated: MH1(1300,660.63)
  round 39.37 hole 39.37 unplated: MH1(1450,672.05)
  round 62.99 hole 62.99 unplated: MH2(950,1193.7)

## Via types
v1: diameter 26/26 (per signal layer), hole 12, Top to Bottom, 133 vias
v2: diameter 29/29 (per signal layer), hole 15, Top to Bottom, 1 vias

## Nets (pads, with @x,y where several pads share a name; then routed paths per layer and width w, separated by ;. In a path a pad name is that pad's centre, name@x,y a point inside that pad or via, vN(x,y) a via of type N, cw(c..) or ccw(c..) an arc to the next point about the centre after c; other vN are vias at no path point)
1.8V: C23.1 J7.15 TP7.P$1 U3.5 | length 906.5
  Top w7: C23.1 v1(300,2000) 365,2000 ; U3.5 362.6,1997.6 365,2000 ; J7.15 949.21,1922.88 938,1934.1 938,1953.57 949.21,1964.78 949.21,1990.79 926.31,2013.69 378.69,2013.69 365,2000
3.3V: 3V3_LED.2 C3.1 C4.1 C5.1 C22.1 C29.1 C30.1 C31.1 C46.1 D3.2 EN1.2 EN2.2 J2.1 J3.2 J4.2 J4.74 J7.14 J7.21 J11.VCC J14.2 JP1.2 MEAS.2 MEAS.4 U3.1 U4.2 U4.3 U4.9 U4.10 | length 9424.1
  Top w7: U3.1 362.6,1780 ; v1(365,1465) 365.63,1464.37 D3.2 ; v1(365,1595) 362.6,1597.4 362.6,1780 ; MEAS.2 MEAS.4 ; C22.1 500,1780 ; J2.1 582.31,900 612.5,930.19 637.5,930.19 688,879.69 688,732 720,700 v1(1089,700) 1146.23,700 1198.5,752.27 1198.5,778.5 1245,825 EN1.2 ; J7.14 929.53,1720.47 930,1720 ; J4.74 1119.33,1154.33 v1(1120,1155) ; J7.21 1067.32,1722.32 1065,1720 ; C46.1 1300,1720 ; U4.3 U4.2 U4.9 U4.10 C29.1@1446.06,479.53 ; v1(1375,600) 1384,609 1542.46,609 C31.1 ; v1(1415,870) 1434,851 EN2.2 ; C30.1 C29.1 C29.1@1446.06,479.53 ; v1(1515,530) 1515,479.53 C29.1@1446.06,479.53 ; J11.VCC 1677.95,1827.05 1665,1840 1340,1840 1300,1800 1300,1720 ; v1(1800,400) JP1.2 ; v1(1870,226.5) v1@1870,228.5 ; 362.6,1780 500,1780 ; 500,1780 560,1720 930,1720 ; 930,1720 1065,1720 ; 1065,1720 v1(1101.5,1720) 1300,1720
  Top w10: C3.1@550,228.5 C3.1 ; C4.1@610,228.5 C4.1 ; C5.1@670,228.5 C5.1
  Top w12: J4.2 v1(1124.33,445.67)
  Top w22: MEAS.4 502,250 523.5,228.5 550,228.5 610,228.5 670,228.5 1140,228.5 ; v1(1124.33,445.67) 1140,430 1140,228.5 ; J14.2 2175,775 2175,443.84 2196,422.84 2196,397.16 2169.16,370.32 J3.2 2076.82,370.32 2056.5,350 2056.5,301.09 1983.91,228.5 1870,228.5 1140,228.5
  Bottom w7: v1(365,1465) v1(365,1595) ; v1(1101.5,1720) 1092,1710.5 1092,1578 1125,1545 1125,1173.44 1120,1168.44 v1(1120,1155) ; v1(1124.33,445.67) 1128.66,450 1325,450 1375,500 1375,530 ; v1(1415,870) 1415,820 1346.5,751.5 1346.5,628.5 v1(1375,600) 1375,530 ; v1(1515,530) 1375,530 ; 3V3_LED.2 1679.5,154.5 1751.5,226.5 1801.5,226.5 ; v1(1800,400) 1800,228 1801.5,226.5 ; v1(1870,226.5) 1801.5,226.5
  Bottom w12: v1(1120,1155) 1140,1135 1140,826.77 1089,775.77 v1(1089,700) 1089,588.57 1126,551.57 1126,489.23 1124.33,487.56 v1(1124.33,445.67)
3.3V_EN: J4.4 VE.1 | length 192.6
  Top w7: v1(988.5,465) 988.85,465.35 J4.4
  Bottom w7: v1(988.5,465) 1016,437.5 VE.1
!BOOT!: J4.11 S2.3 S2.4 | length 1048.3
  Top w7: J4.11 880.75,534.25 v1(885,530) ; S2.4 v1(1350,275) S2.3
  Bottom w7: v1(885,530) 885,336.77 946.77,275 v1(1350,275)
!RESET!: J2.10 J4.6 J9.1 S1.3 S1.4 | length 1342.7
  Top w7: J2.10 646,679 646,654.2 685,615.2 v1(685,575) ; v1(700,350) 775,275 S1.4 S1.3 1085,275 1100,290 v1(1100,350) ; J4.6 1085.04,485.04 v1(1100,500)
  Bottom w7: v1(685,575) 685,551.93 641.5,508.43 641.5,388.5 680,350 v1(700,350) J9.1 ; v1(1100,350) v1(1100,500)
A0: J4.34 J8.1 | length 1310.6
  Top w7: J4.34 1145.63,760.63 v1(1150,765) ; v1(1248,980.98) 1596.65,980.98 1610.13,967.5 2067.5,967.5 J8.1
  Bottom w7: v1(1150,765) 1248,863 v1(1248,980.98)
A1: J4.38 J8.2 | length 1342.5
  Top w7: J4.38 v1(1150,800) ; v1(1215,980.98) 1224.5,990.48 1224.5,990.71 1238.27,1004.48 1592.95,1004.48 1615.93,981.5 1981.5,981.5 J8.2
  Bottom w7: v1(1150,800) 1215,865 v1(1215,980.98)
CAMERA_D0: J4.40 J7.11 | length 1464.5
  Top w7: v1(845,825) 850.32,819.68 J4.40 ; v1(866.66,1954.62) 870.47,1950.81 J7.11
  Bottom w7: v1(845,825) 845,886.19 833,898.19 833,1077 819.08,1090.92 819.08,1114.73 838.08,1133.73 838.08,1722.48 897.71,1782.11 897.71,1923.57 v1(866.66,1954.62)
CAMERA_D1: J4.42 J7.22 | length 1491.7
  Top w7: J4.42 1093.37,839.37 v1(1094,840) ; v1(1083.08,1975) 1087.01,1971.08 J7.22
  Bottom w7: v1(1083.08,1975) 1071,1962.92 1071,1934.47 1052,1915.47 1052,1573.37 1073,1552.37 1073,1043.6 951.5,922.1 951.5,865.19 965.27,851.43 1082.57,851.43 v1(1094,840)
CAMERA_D2: J4.44 J7.16 | length 1370.1
  Top w7: v1(880,855) 961.69,855 965.27,851.43 984.73,851.43 992.36,859.06 J4.44 ; v1(961.5,1943.83) 968.9,1936.43 J7.16
  Bottom w7: v1(880,855) 880,994.93 870.58,1004.35 870.58,1050.58 880.08,1060.08 880.08,1705.08 965,1790 965,1940.33 v1(961.5,1943.83)
CAMERA_D3: J4.46 J7.20 | length 1616.9
  Top w7: J4.46 1090.26,878.74 v1(1094,875) ; J7.20 1047.64,1930.9 1057,1940.27 1057,1959.73 1050.08,1966.65 v1(1050.08,1980.08)
  Bottom w7: v1(1050.08,1980.08) 1050.08,1966.65 1057,1959.73 1057,1940.27 1038,1921.27 1038,1567.57 1059,1546.57 1059,1049.4 937.5,927.9 937.5,859.39 959.47,837.43 1063.34,837.43 1084.27,816.5 1103.73,816.5 1117.5,830.27 1117.5,849.73 1094,873.23 v1(1094,875)
CAMERA_D4: J4.48 J7.13 | length 1390.1
  Top w7: v1(856.5,907.93) 866,898.43 J4.48 ; J7.13 909.84,1959.13 v1(925.71,1975)
  Bottom w7: v1(856.5,907.93) 856.5,1056.3 866.08,1065.88 866.08,1710.88 925.71,1770.51 v1(925.71,1975)
CAMERA_D5: J4.73 J7.5 | length 1074.4
  Top w7: v1(669.17,1150.83) 671.5,1148.5 699.73,1148.5 703.75,1144.49 J4.73 ; v1(740.57,1957.76) 750.07,1948.26 750.07,1939.47 752.36,1937.17 J7.5
  Bottom w7: v1(669.17,1150.83) 756.18,1150.83 768.08,1162.73 768.08,1921.45 750.07,1939.47 750.07,1948.26 v1(740.57,1957.76)
CAMERA_D6: J4.71 J7.6 | length 1097.5
  Top w7: v1(690,1125) 690.2,1124.8 J4.71 ; v1(765.45,1979.55) 765.45,1966.12 764.07,1964.73 764.07,1945.27 772.05,1937.29 J7.6
  Bottom w7: v1(690,1125) 750.15,1125 782.08,1156.93 782.08,1927.25 764.07,1945.27 764.07,1964.73 765.45,1966.12 v1(765.45,1979.55)
CAMERA_D7: J4.69 J7.12 | length 1109.1
  Top w7: J4.69 842.46,1105.12 v1(842.58,1105) ; J7.12 890.16,1972.68 v1(892.71,1975.23)
  Bottom w7: v1(842.58,1105) 852.08,1114.5 852.08,1716.68 911.71,1776.31 911.71,1955.77 902.21,1965.27 902.21,1965.73 v1(892.71,1975.23)
CAMERA_HSYNC: J4.65 J7.9 | length 1160.7
  Top w7: J4.65 808.75,1065.75 v1(809.5,1065) ; J7.9 831.1,1965.73 v1(847.68,1982.32)
  Bottom w7: v1(809.5,1065) 809.5,1080.7 805.08,1085.12 805.08,1120.53 824.08,1139.53 824.08,1728.28 883.71,1787.91 883.71,1917.77 870.36,1931.12 856.92,1931.12 843.16,1944.89 843.16,1964.35 847.68,1968.88 v1(847.68,1982.32)
CAMERA_INT: J4.16 J7.7 | length 1627
  Top w7: v1(787.57,1955) 791.73,1950.83 J7.7 ; v1(945,595) 956.54,583.46 J4.16
  Bottom w7: v1(787.57,1955) 796.08,1946.49 796.08,1151.13 772,1127.05 772,939.39 819,892.39 819,817.77 823.5,813.27 823.5,716.5 v1(945,595)
CAMERA_MCLK: J4.56 J7.17 | length 1269
  Top w7: v1(894.08,1014.08) 895,1015 900,1015 937.83,977.17 J4.56 ; v1(977,1975) 986.5,1965.5 986.5,1965.27 988.58,1963.18 J7.17
  Bottom w7: v1(894.08,1014.08) 894.08,1699.08 985,1790 985,1967 v1(977,1975)
CAMERA_VSYNC: J4.63 J7.19 | length 1381.2
  Top w7: J4.63 795.2,1046.06 799.77,1041.5 826.7,1041.5 868.7,1083.5 951.23,1083.5 965,1069.73 965,1020 v1(980,1005) ; J7.19 1027.95,1944.45 v1(1033.5,1950)
  Bottom w7: v1(980,1005) 1045,1070 1045,1540.77 1024,1561.77 1024,1940.5 v1(1033.5,1950)
D0/HEADER_!CS!: J4.10 J5.4 J8.5 | length 3413.6
  Top w7: J5.4 120,1420 1220,1420 1245,1395 1245,1250 1275,1220 1320,1220 v1(1350,1250) 1950,1250 J8.5 ; J4.10 1165.59,524.41 v1(1175,515)
  Bottom w7: v1(1175,515) 1175,702.45 1236.67,764.12 1306.67,764.12 1340.25,797.7 1340.25,871.04 1299.5,911.79 1299.5,1199.5 v1(1350,1250)
D1/CAMERA_TRIG: J4.18 J7.18 J8.6 | length 3490.2
  Top w7: v1(945.23,628) 970.08,603.15 J4.18 1111.19,603.15 v1(1115,599.33) ; J7.18 1008.27,1973.27 v1(1010,1975) ; v1(1300,1250) 1323.5,1273.5 1359.73,1273.5 1369.23,1264 1864,1264 J8.6
  Bottom w7: v1(945.23,628) 903.5,669.73 903.5,968.5 1031,1096 1031,1534.97 1010,1555.97 v1(1010,1975) ; v1(1115,599.33) 1115,662.25 1235.87,783.12 1300.87,783.12 1326.25,808.5 1326.25,860.24 1285.5,900.99 1285.5,1235.5 v1(1300,1250)
GND: BT1.- C1.2 C2.- C3.2 C4.2 C5.2 C13.2 C22.2 C23.2 C29.2 C30.2 C31.2 C46.2 D1.A D2.C D4.C E1.2 E1.3 E1.6 E1.7 E1.8 E2.2 E2.3 E2.7 E2.8 E2.9 H5.1 J1.GND J1.GND2 J2.3 J2.5 J2.9 J3.1 J4.1 J4.7 J4.33 J4.36 J4.39 J4.45 J4.75 J5.5 J6.3 J7.10 J7.23 J10.1 J10.2 J10.3 J10.4 J10.5 J10.6 J11.CD1 J11.GND J11.GND1 J11.GND3 J14.1 R2.1 R3.1 R9.1 S1.1 S1.2 S2.1 S2.2 U3.2 U4.5 U4.6 U4.7 U4.8 U5.4 U5.EP | length 694.3
  Top w7: v1(850,1835) 850.79,1835.79 J7.10 ; J7.23 1106.69,1843.31 v1(1115,1835) ; v1(1250,620) 1284.96,620 E1.7 E1.3 E1.6 E1.8 ; 1300,790 1301.81,788.19 ; E2.2 1438.66,721.34 1450,710 E2.8 ; C31.2 1487.01,683.46 E2.7 ; E2.8 E2.7 ; E2.8 E2.9 E2.3 E2.7
  Top w22: J1.GND2 293.5,273.03 R3.1 ; J1.GND 293.5,526.97 R2.1
  other v1: 950,100 1350,100 305,220 2125,290 435,310 500,310 620,355 1475,365 1365,385 305,400 350,400 400,400 450,400 685,430 795,440 795,495 650,560 285,585 480,595 1405,635 465,700 800,750 980,780 795,820 795,855 1550,885 1450,890 500,1100 690,1185 660,1285 1250,1645 1765,1720 300,1820 690,1835 400,1900 550,1950
I2C_!INT!: U4.12
I2C_SCL: J3.4 J4.14 J7.4 J14.4 R4.1 U4.1 | length 3455.2
  Top w7: v1(728.86,1924.76) 732.68,1920.95 J7.4 ; v1(950,559.96) 953.82,563.78 J4.14 1320,563.78 ; U4.1 1320.47,563.31 1320,563.78 ; v1(2120,485) 2110,475 J3.4 2000.94,449.06 1983.46,466.54 R4.1 1983.46,526.54 1965,545 1886.59,545 1849.59,508 1605.23,508 1549.45,563.78 1320,563.78
  Bottom w7: v1(728.86,1924.76) 728.86,1718.86 635.67,1625.67 635.67,961.1 695,901.77 695,811.77 935.27,571.5 938.46,571.5 v1(950,559.96) ; v1(2120,485) 2121.5,483.5 2121.5,405.27 2140.27,386.5 2229.73,386.5 2250,406.77 J14.4
I2C_SDA: J3.3 J4.12 J7.3 J14.3 R1.1 U4.4 | length 3606.5
  Top w7: v1(706.21,1948.79) 706.21,1935.35 705.36,1934.5 705.36,1915.03 712.99,1907.4 J7.3 ; v1(980,535) 989.09,544.09 J4.12 1245.91,544.09 1295,495 1295,430.45 1304.97,420.47 U4.4 1320.47,359.53 1370,310 1660,310 1720,250 1975,250 1985,260 1985,298.46 R1.1 2025,300 2035,310 2035,395 2049.69,409.69 J3.3 2164.69,409.69 v1(2165,410)
  Bottom w7: v1(706.21,1948.79) 706.21,1935.35 705.36,1934.5 705.36,1914.64 714.86,1905.14 714.86,1724.66 621.67,1631.46 621.67,955.3 681,895.97 681,805.97 926.5,560.47 926.5,550.23 941.73,535 v1(980,535) ; v1(2165,410) 2165,665 J14.3
I2S_SCK/PDM_CLK: E1.4 E2.4 J4.50 | length 825.9
  Top w7: J4.50 1333.66,918.11 1365,886.77 1365,710 ; E1.4 1363.19,711.81 1365,710 ; v1(1370,675) 1365,680 1365,710 ; E2.4 1506.34,721.34 v1(1530,745)
  Bottom w7: v1(1370,675) 1385,675 1445,735 1520,735 v1(1530,745)
I2S_SD/CAMERA_PCLK: E2.6 J4.54 J7.8 | length 2018.9
  Top w7: v1(809.5,960) 812.02,957.48 J4.54 1467.52,957.48 v1(1470,955) ; v1(811.07,1978.93) 811.42,1978.58 J7.8 ; E2.6 v1(1450,780)
  Bottom w7: v1(809.5,960) 809.5,1016.77 786,1040.27 786,1121.25 810.08,1145.33 810.08,1805.08 811.07,1806.07 v1(811.07,1978.93) ; v1(1450,780) 1450,856.77 1473.5,880.27 1473.5,951.5 v1(1470,955)
I2S_WS/PDM_DAT: E1.1 E2.1 J4.52 | length 1029.5
  Top w7: J4.52 1347.2,937.8 1380,905 1380,753.7 ; E1.1 1233.82,751.18 1220,737.36 1220,605 1235,590 1321.77,590 1393.5,661.73 1393.5,684.73 1380,698.23 1380,753.7 ; E2.1 1380,753.7
N$1: R6.2 VIN_LED.1 | length 206.6
  Top w7: R6.2 1966.54,181.54 1985,200 v1(2030,200)
  Bottom w7: VIN_LED.1 2020.5,190.5 v1(2030,200)
N$2: JP1.3 R4.2 | length 73.4
  Top w7: R4.2 1916.54,473.46 1949,441 JP1.3
N$3: JP1.1 R1.2 | length 72.9
  Top w7: R1.2 1950,333.46 JP1.1
N$4: E1.5 EN1.1 | length 80
  Top w7: EN1.1 1320.5,789.5 1335.43,774.57 E1.5
N$5: E2.5 EN2.1 | length 79.3
  Top w7: EN2.1 1466,814 1485.43,794.57 E2.5
N$6: 3V3_LED.1 R11.2 | length 153.8
  Top w7: v2(1720,155) 1725,150 R11.2
  Bottom w7: v2(1720,155) 1720,100.5 3V3_LED.1
N$7: D2.A R11.1 | length 50.4
  Top w7: R11.1 1883.46,101.06 D2.A
N$8: D4.A R6.1 | length 50.4
  Top w7: R6.1 2033.46,101.06 D4.A
N$10: J1.A5 R2.2 | length 70.6
  Top w7: J1.A5 282.68,449.21 R2.2
N$11: J1.B5 R3.2 | length 64.4
  Top w7: J1.B5 297.64,331.1 R3.2
N$12: D1.C R5.1 U5.5 VE.2 | length 944.4
  Top w7: U5.5 438.39,483.39 450,495 500,495 ; D1.C 511.81,445.28 R5.1 500,495 ; v1(665,498.7) 661.3,495 500,495
  Bottom w7: v1(665,498.7) 721.3,555 825,555 826.5,553.5 894.73,553.5 908.5,539.73 908.5,356.5 930,335 VE.2
N$14: BT1.+ D6.A R8.1 | length 146.7
  Top w7: D6.A 404.72,1261.81 R8.1 420,1246.54 BT1.+
PWM0: J4.32 J8.3 | length 1532.9
  Top w7: J4.32 1136.06,740.94 v1(1145,732) ; v1(1250,1150) 2050,1150 J8.3
  Bottom w7: v1(1145,732) 1154.5,741.5 1159.73,741.5 1271.5,853.27 1271.5,990.71 1250,1012.21 v1(1250,1150)
PWM1/CAM_VDD: J4.47 J8.4 U3.3 | length 2978.3
  Top w7: v1(435,1805) 437.4,1807.4 U3.3 ; v1(560,1360) 1050,1360 1101.5,1308.5 v1(1101.5,1183.17) 1983.17,1183.17 J8.4 ; J4.47 784.68,888.58 788.84,884.43 965.5,884.43 v1(975,874.93)
  Bottom w7: v1(435,1805) 560,1680 v1(560,1360) ; v1(975,874.93) 1011.07,911 1065.6,911 1092,937.4 1092,1173.67 v1(1101.5,1183.17)
RTC_3V: D3.3 D6.C J4.72 R8.2 | length 817.6
  Top w7: D3.3 450,1350 480,1320 D6.C ; R8.2 495.28,1261.81 D6.C ; J4.72 934.21,1134.65 910.37,1158.49 886.51,1158.49 850,1195 850,1250 780,1320 D6.C
RX1: J4.19 J6.2 | length 998.7
  Top w7: J4.19 802.99,612.99 v1(805,615)
  Bottom w7: J6.2 148.23,1050 583.23,615 v1(805,615)
SPI_!CS!: J4.55 J11.CS/DAT3 | length 1811.8
  Top w7: v1(680,1465) v1(1590,1465) ; v1(695,1270) 695,1259.8 631.67,1196.46 631.67,1018.54 679.6,970.6 739.04,970.6 J4.55 ; v1(1590,1695) 1591.34,1696.34 J11.CS/DAT3
  Bottom w7: v1(680,1465) 695,1450 v1(695,1270) ; v1(1590,1465) v1(1590,1695)
SPI_CIPO: J4.61 J5.3 J11.DO/DAT0 | length 2716.6
  Top w7: J5.3 107.88,1507.88 978.36,1507.88 995.71,1525.23 v1(1007.5,1525.23) 1750.23,1525.23 1810,1585 1810,1700 1807.87,1702.13 J11.DO/DAT0 ; J4.61 831.38,1026.38 865,1060 v1(941.5,1060)
  Bottom w7: v1(941.5,1060) 1017,1135.5 1017,1515.73 v1(1007.5,1525.23)
SPI_COPI: J4.59 J5.2 J11.DI/CMD | length 2556.5
  Top w7: J5.2 v1@966.5,1550 ; J4.59 831.49,1006.69 862.38,1037.58 903.82,1037.58 908.98,1032.42 v1(922.42,1032.42) ; v1(970,1546.5) v1@966.5,1550 ; J11.DI/CMD 1635,1770.91 1635,1580 1601.5,1546.5 1240.27,1546.5 1236.77,1550 v1@966.5,1550
  Bottom w7: v1(922.42,1032.42) 922.42,1045.85 918,1050.27 918,1071.91 1003,1156.91 1003,1496.5 984,1515.5 984,1532.5 v1(970,1546.5)
SPI_SCK: J4.57 J5.1 J11.SCLK | length 3929
  Top w7: J5.1 274.64,1650 354.64,1570 v1(1250,1570) ; v1(720,1383.5) 729.5,1374 1101.2,1374 1269.2,1206 1325.8,1206 1326.47,1206.67 v1(1720,1206.67) ; v1(735,1270) 645.67,1180.67 645.67,1024.33 682.99,987.01 J4.57 ; v1(1720,1695) 1721.26,1696.26 J11.SCLK
  Bottom w7: v1(720,1383.5) 735,1368.5 v1(735,1270) ; v1(1250,1570) 1409.64,1570 1559.64,1720 1635.36,1720 1660.36,1695 v1(1720,1695) v1(1720,1206.67)
SWDCK: J2.4 J4.21 | length 298.1
  Top w7: J2.4 660,815 660,660 687.32,632.68 J4.21
SWDIO: J2.2 J4.23 | length 325.3
  Top w7: J2.2 674,851 674,671 692.64,652.36 J4.23
TX1: J4.17 J6.1 | length 1153.8
  Top w7: J4.17 793.46,593.31 795.27,591.5 837,591.5 v1(845,583.5)
  Bottom w7: J6.1 68.03,1150 583.03,635 791.77,635 795.27,638.5 814.73,638.5 828.5,624.73 828.5,600 v1(845,583.5)
USB_D+: J1.A6 J1.B6 J4.3 | length 708.6
  Top w7: v1(186.93,385) 200,385 ; J1.B6 204.53,370.47 200,375 200,385 ; J1.A6 204.84,409.84 200,405 200,385 ; v1(615,456.7) 616.18,455.51 J4.3
  Bottom w7: v1(186.93,385) 248.43,446.5 609.73,446.5 615,451.77 v1(615,456.7)
USB_D-: J1.A7 J1.B7 J4.5 | length 734.6
  Top w7: v1(190.88,429.12) 239.59,429.12 J1.B7@240,429.53 ; J1.A7 270.16,390.16 275,395 275,425 270.47,429.53 J1.B7@240,429.53 ; J1.B7 J1.B7@240,429.53 ; v1(540,470) 550.2,480.2 629.73,480.2 634.73,475.2 J4.5
  Bottom w7: v1(190.88,429.12) 231.77,470 v1(540,470)
V_USB: BYP.1 F2.1 J1.VBUS1 J1.VBUS2 | length 735.8
  Top w12: J1.VBUS2 212.27,303.54 203.79,312.02 162.98,312.02 150,325 150,475 162.98,487.98 203.79,487.98 212.27,496.46 J1.VBUS1
  Top w22: BYP.1 115,800 90.94,775.94 F2.1 90.94,628.65 108.91,610.69 108.91,501.09 122.02,487.98 162.98,487.98
VIN: BYP.2 C1.1 C2.+ C13.1 F2.2 J4.9 R5.2 R10.2 U5.8 VIN_LED.2 | length 2969.8
  Top w7: R5.2 528.46,395 v1(685,395) ; J4.9 781.33,514.57 785.27,518.5 842.25,518.5 v1(850,510.75)
  Top w12: 366.54,515 366.73,515.2 540,515.2 ; R10.2 540,515.2 ; J4.9 690.43,514.57 680.3,524.7 654.23,524.7 644.73,515.2 540,515.2
  Top w22: BYP.2 195,800 209.06,785.94 F2.2 C2.+ 294.88,636.65 321.54,610 C1.1 C13.1 366.54,515
  Bottom w7: v1(685,395) 660,420 660,450 728.5,518.5 842.25,518.5 v1(850,510.75) 871,489.75 871,330.97 940.97,261 969,261 978.5,251.5 1458.5,251.5 1595,115 1595,85 1660,20 1845,20 1925,100 VIN_LED.2
VIN/3: J4.49 R9.2 R10.1 | length 582.5
  Top w7: R9.2 R10.1 540,935 549.18,944.19 643.3,944.19 679.22,908.27 J4.49
VREG_3.3V: MEAS.1 MEAS.3 U5.1 | length 30
  Top w7: MEAS.3 MEAS.1
pads on no net: D3.1 FD1.1 FD2.1 FD3.1 FD4.1 J1.A8 J1.B8 J1.SHLD1 J1.SHLD2 J1.SHLD3 J1.SHLD4 J2.6 J2.7 J2.8 J3.NC1 J3.NC2 J4.8 J4.13 J4.15 J4.20 J4.22 J4.35 J4.37 J4.41 J4.43 J4.51 J4.53 J4.58 J4.60 J4.62 J4.64 J4.66 J4.67 J4.68 J4.70 J4.A1 J4.A2 J7.1 J7.2 J7.24 J7.MNT1 J7.MNT2 J11.CD2 J11.DAT1 J11.DAT2 U3.4 U4.11 U5.2 U5.3 U5.6 U5.7

## Polygon pours and split planes (outlines as drawn)
GND on Bottom "Polygon_1_Net_GND" (solid, remove dead copper, pour order 1): -3.5,2053.5 2303.5,2053.5 2303.5,-3.5 -3.5,-3.5
VREG_3.3V on Top "Polygon_1_Net_VREG_3.3V" (solid, remove dead copper, pour order 0): 324,371 324,244 406,244 406,371
VIN on Top "Polygon_1_Net_VIN" (solid, remove dead copper, pour order 2): 406,429 324,429 324,571 406,571
GND on Top "Polygon_2_Net_GND" (solid, remove dead copper, pour order 3): -3.5,2053.5 2303.5,2053.5 2303.5,-3.5 -3.5,-3.5

## Keep-outs
Keep-Out Layer:
  the board outline again, w10

## Other copper
Bottom:
  text "v13" at 311.61,20.26 h42.5

## Silkscreen, mask and mechanical layers (free items; w line width, h text height)
Dimension:
  the board outline again, w10
tDocu:
  text "N. Seidle" at 1100,-400 h59.5
tPlace:
  circle w20: c1615,225 r5
  circle w8: c1615,225 r31.62
  region: 2272.5,1592.5 2272.5,1742.5 2282.5,1742.5 2282.5,1592.5
  region: 2217.5,1592.5 2217.5,1742.5 2227.5,1742.5 2227.5,1592.5
  region: 2217.5,1012.5 2217.5,1600 2282.5,1600 2282.5,1012.5
  lines w8: 1100,365 1739.57,365 1739.57,1235 1100,1235 ; 1595,150 1615,130 ; 1635,150 1615,130 ; 1695,205 1715,225 ; 1695,245 1715,225 ; 1615,130 1615,225 1715,225
  text "+" at 385,1130 h59.5 r90
  text "-" at 545,975 h59.5
bPlace:
  region: 2229.5,1741.5 2229.5,1598 2217.5,1598 2217.5,1741.5
  region: 2282.5,1742 2282.5,1598.5 2270.5,1598.5 2270.5,1742
  region: 2282.5,1600 2282.5,1012.5 2217.5,1012.5 2217.5,1600

## Text inside footprints (layer, text, board x,y; h text height)
FRAME1: tDocu "Designed by:" at 500,-400 h59.5; tDocu "https://creativecommons.org/licenses/by-sa/4.0/" at 50,-300 h59.5; tDocu "Released under the Creative Commons Attribution Share-Alike 4.0 License" at -750,-200 h59.5
J11: tDocu "Unlocked" at 1925,2175 h42.5; tDocu "Locked" at 1925,2050 h42.5; tDocu "Pressed" at 1925,1975 h42.5
U4: tDocu "Z" at 1337,462 h4.25; tDocu "Y" at 1352,452 h4.25; tDocu "X" at 1345,441 h4.25